# Altium PCB IR_Remote_LEDs.PcbDoc
Units mm, origin at the board's own origin, x right, y up, seen from the top; angles counter-clockwise.
Board outline 35 x 8 mm, 2 copper layers (Top Layer, Bottom Layer); 5 components, 4 nets, 11 pads, 0 vias.
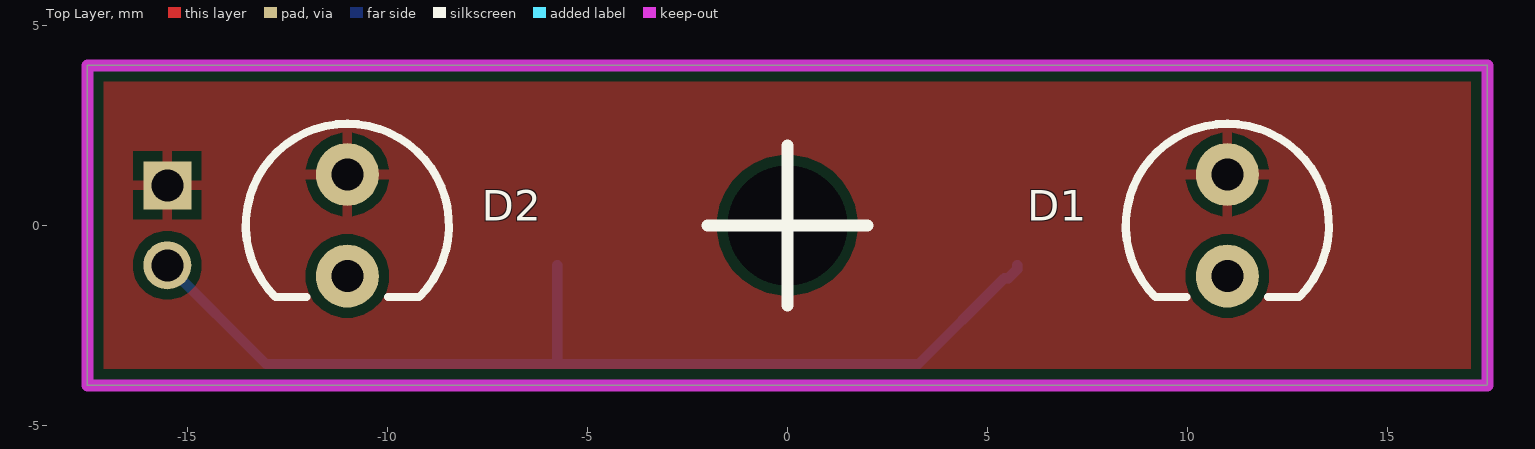
[diagram p0: Top Layer view]
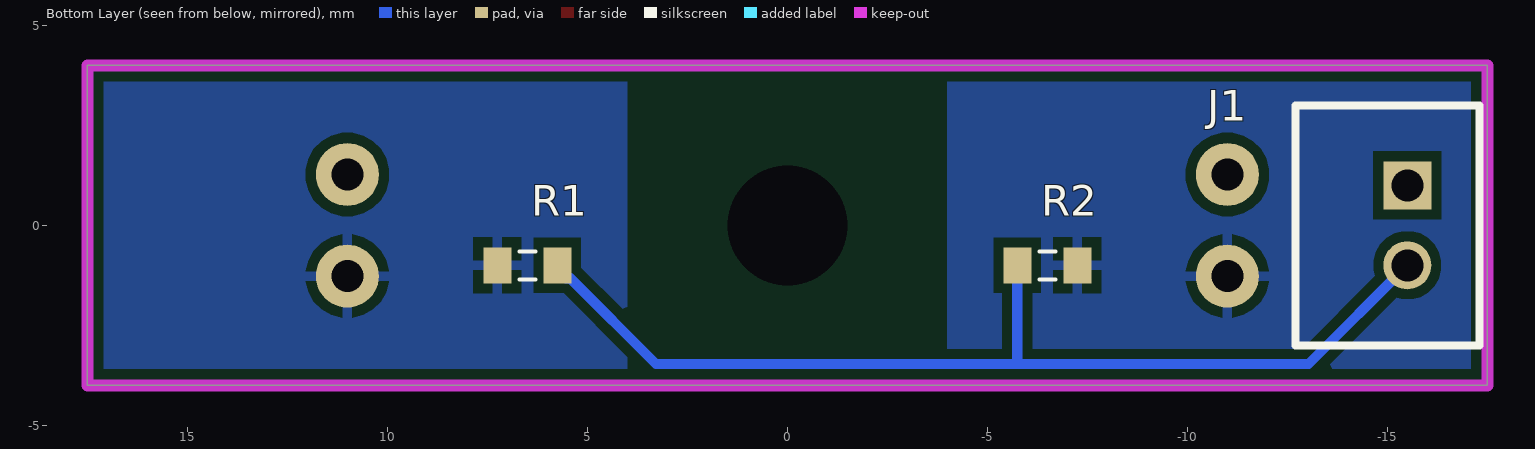
[diagram p1: Bottom Layer view, seen from below]
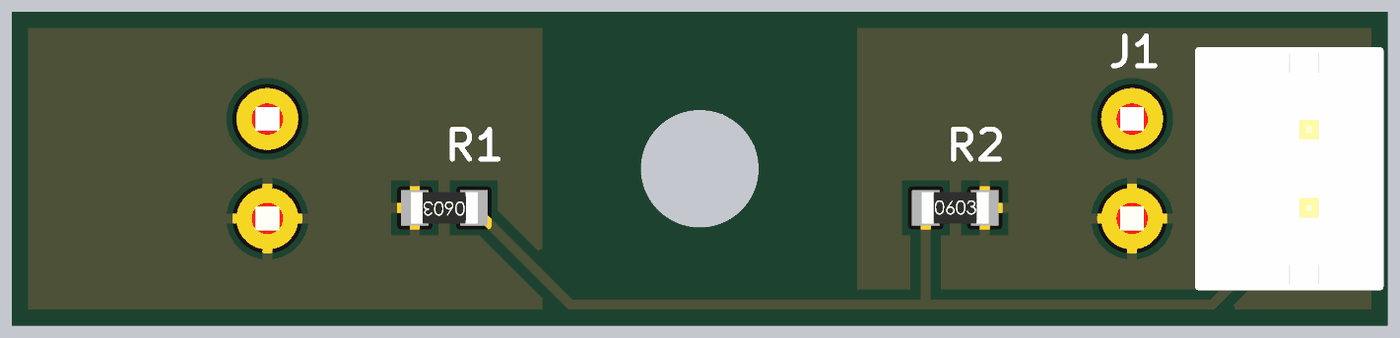
[diagram p2: 3D render of the assembled board from below, using the file's embedded part models]

## Layer stack, top to bottom
Top Solder: solder mask 0.0102, Solder Resist, Dk 3.5
Top Layer: signal copper 0.0356
Dielectric 1: dielectric 0.32, FR-4, Dk 4.8
Bottom Layer: signal copper 0.0356
Bottom Solder: solder mask 0.0102, Solder Resist, Dk 3.5

## Board outline
-17.5,-4 -17.5,4 17.5,4 17.5,-4

## Design rules (kind name [scope] priority, off if disabled: settings)
Clearance [All] p1: gap=0.254 ignorepadtopadclearanceinfootprint=FALSE
HoleSize [All] p1: absolutevalues=TRUE maxlimit=3 minlimit=0.025 maxpercent=80.000 minpercent=20.000
PolygonConnect [All] p1: connectstyle=Relief reliefconductorwidth=0.254 reliefentries=4 polygonreliefangle="90 Angle" airgapwidth=0.254
RoutingVias [All] p1: holewidth=0.711 width=1.27 viastyle="Through Hole" minholewidth=0.711 minwidth=1.27 maxholewidth=0.711 maxwidth=1.27
SolderMaskExpansion [All] p1: expansion=0.102 istentingtop=FALSE
SupplyNets "Schematic Supply Nets_1" [InNet('BAT+')] p1: voltage=0.000
Width [All] p1: maxlimit=0.254 minlimit=0.254 preferedwidth=0.254
29 further rules are at their usual default settings.

## Components (designator, comment, footprint, x,y, rotation, side; value= is the part's Value field where it differs from the comment)
D1 "LED Red" LED5MM 11,0 r270 top locked
D2 "LED Red" LED5MM -11,0 r270 top locked
J1 "Connector - JST PH 2-Pin" JST-P2B-PH -15.5,1 r90 bottom locked
R1 "75R" CR1608-0603_N 6.5,-1 r0 bottom
R2 "75R" CR1608-0603_N -6.5,-1 r180 bottom

## Footprints (in the part's own frame and the unit in brackets; to place one, negate y for a bottom-side part, rotate by r counter-clockwise, add the part's x,y. Pads: shape width x height; smd on the part's side, far side on the other; paste and mask are expansions set on the pad)
CR1608-0603_N [mm]
  rect 0.7x0.9 smd: 1(-0.75,0) 2(0.75,0)
  silkscreen extent -0.2,-0.35 0.2,0.35, body extent -0.85,-0.4 0.85,0.4, height 0.56
JST-P2B-PH [mm] "JST-PH 2 pin connector"
  rect 1.2x1.2 hole 0.8: 1(0,0)
  round 1.2 hole 0.8: 2(-2,0)
  silkscreen extent -4,-1.8 2,2.8, body extent -3.95,-1.7 1.95,2.8, height 6
LED5MM [mil] "LED 5mm through-hole"
  round 62 hole 31.5: A(-50,0) K(50,0)
  silkscreen extent -100,-100 71,100, body extent -118,-118 98,118, height 335

## Part data
D1 D2: library part LED_5MM_RED, "LED 5mm Red", LCSC=C2286, Manufacturer="Generic Components", Class I=Optoelectronic, Class II=LED, Farnell PN=1581239, Published=8-Jun-2000, Publisher="Altium Limited", Revision="July-2002: Re-released for DXP Platform."
J1: library part JST-B2B-PH-A, LatestRevisionDate=17-Jul-2002, LatestRevisionNote="Re-released for DXP Platform.", Publisher="Altium Limited"
R1 R2: library part Res_CR0603_75R, "100mW SMT ±1% 0603 Chip Resistor", LCSC=C4275, Manufacturer="Generic Components", Class=Passive, Published=08/06/2000, Publisher="Altium Hobart Technology Centre", SubClass=Resistor

## Free pads (board coordinates)
  rect 0x0 hole 3 unplated: 0(0,0)

## Nets (pads, with @x,y where several pads share a name; then routed paths per layer and width w, separated by ;. In a path a pad name is that pad's centre, name@x,y a point inside that pad or via, vN(x,y) a via of type N, cw(c..) or ccw(c..) an arc to the next point about the centre after c; other vN are vias at no path point)
BAT+: D1.A D2.A J1.1
NetD1_K: D1.K R1.2
NetD2_K: D2.K R2.2
NetJ1_2: J1.2 R1.1 R2.1 | length 25.8
  Bottom Layer w0.254: J1.2 -13.031,-3.469 3.281,-3.469 5.427,-1.323 5.527,-1.323 5.75,-1.1 R1.1 ; -5.75,-3.429 R2.1

## Polygon pours and split planes (outlines as drawn)
BAT+ on Top Layer "NONET_L-01_P-001" (solid, remove dead copper, pour order 0): -17.5,4 17.5,4 17.5,-4 -17.5,-4
NetD2_K on Bottom Layer "NONET_L-01_P-001" (solid, pour order 2): -17.5,4 -4,4 -4,-4 -17.5,-4
NetD1_K on Bottom Layer "NONET_L-01_P-001" (solid, pour order 1): 4,4 17.5,4 17.5,-4 4,-4

## Keep-outs
Keep-Out Layer:
  the board outline again, w0.3

## Silkscreen, mask and mechanical layers (free items; w line width, h text height)
Top Overlay:
  lines w0.3: -2,0 2,0 ; 0,-2 0,2

## Dimensions
17.5,4 to 17.5,-4 on Mechanical 1
-17.5,4 to 17.5,4 on Mechanical 1